# EAGLE board logic 7408.v1.2 (EAGLE 7.1.0)
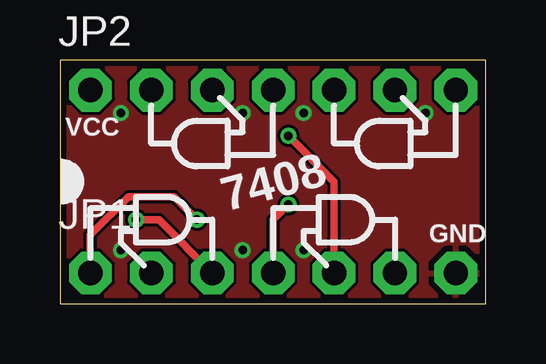
[diagram p0: board, top side]
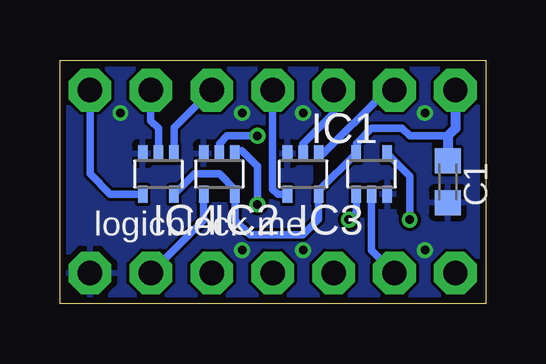
[diagram p1: board, bottom side, seen from below]

Size 17.76 x 10.15 mm. Coordinates in mm from the lower left corner, seen from the top.
Outline: 0,0 17.76,0 17.76,10.15 0,10.15 0,0
Copper layers (1*16): Top 0.035mm / dielectric 1.5mm / Bottom 0.035mm
Design rules "dirt_cheap_dirty_boards.v1": minimum track width 5mil, minimum drill 12mil, track to track 5mil, track to pad 5mil, pad to pad 5mil, via to via 5mil, smd to smd 0mil, copper to edge 10mil, drill to drill 10mil, minimum pad ring 10mil, minimum via ring 6mil, stop-mask expansion 2mil, vias tented up to drill 25mil, thermal gap 10mil
bRestrict: 3 lines

## Footprints (pad centres in the part's own frame; a part is rotated, then mirrored left to right if it is on the bottom)
C0603K = smd 1.05 x 1.08: 1 -0.875,0; 2 0.875,0
SC70-5 = smd 0.4 x 0.7: 1 -0.65,-0.85; 2 0,-0.85; 3 0.65,-0.85; 4 0.65,0.85; 5 -0.65,0.85
CON_1X07-CLEANBIG = drill 1.016 pad 1.778 octagon: 1 -8.89,0; 2 -6.35,0; 3 -3.81,0; 4 -1.27,0; 5 1.27,0; 6 3.81,0; 7 6.35,0

## Placement (x,y rotation side)
C1  100nF  [C0603K]  1.59,5.08 270 bottom
IC1  [SC70-5]  4.76,5.4 0 bottom
IC2  [SC70-5]  11.11,5.4 180 bottom
IC3  [SC70-5]  7.62,5.4 180 bottom
IC4  [SC70-5]  13.65,5.4 180 bottom
JP1  [CON_1X07-CLEANBIG]  10.16,1.27 0 top
JP2  [CON_1X07-CLEANBIG]  10.16,8.89 0 top
U$1  OSHW-LOGOS-LAYER230  [OSHW-LOGO-S_LAYER230]  16.19,5.4 90 top

## Library data of the parts
C1 = rcl
IC1-IC4 = 74xx-little-de
JP1 JP2 = Ardublog
U$1 = logicblock

## Nets
1Y: IC1.4 JP1.3
2Y: IC2.4 JP1.6
3Y: IC4.4 JP2.7
4Y: IC3.4 JP2.4
GND: C1.2 IC1.3 IC2.3 IC3.3 IC4.3 JP1.7
N$1: IC1.1 JP1.1
N$2: IC1.2 JP1.2
N$4: IC4.2 JP2.6
N$5: IC2.1 JP1.4
N$6: IC2.2 JP1.5
N$7: IC4.1 JP2.5
N$9: IC3.2 JP2.3
N$10: IC3.1 JP2.2
VCC: C1.1 IC1.5 IC2.5 IC3.5 IC4.5 JP2.1

## Tracks (layer width: path | path; a pad name or v marks a point on that pad's centre or on a via)
1Y  (via drill 0.36)
  Top 0.305: v3.17,3.49 4.13,3.49 JP1.3
  Bottom 0.305: IC1.4 3.17,5.31 v3.17,3.49
2Y
  Bottom 0.305: IC2.4 11.76,3.48 JP1.6
3Y
  Bottom 0.305: IC4.4 15.66,4.55 16.51,5.4 JP2.7
4Y
  Bottom 0.305: IC3.4 8.68,4.55 8.89,4.76 JP2.4
GND  (via drill 0.36)
  other vias: 2.54,2.22 2.54,7.94 7.62,7.94 15.24,7.94 7.62,2.22 10.16,2.22 10.16,7.94
  pour Bottom: 0,0 0,10.16 17.78,10.16 17.78,0
  pour Top: 0,0 0,10.16 17.78,10.16 17.78,0
N$1  (via drill 0.36)
  Top 0.305: v5.71,3.49 4.76,4.45 2.86,4.45 1.27,2.86 JP1.1
  Bottom 0.305: IC1.1 5.41,4.43 5.4,4.43 5.4,3.81 v5.71,3.49
N$2
  Bottom 0.305: IC1.2 4.76,2.22 JP1.2
N$4
  Bottom 0.305: JP2.6 13.97,7.62 13.65,7.3 IC4.2
N$5  (via drill 0.36)
  Top 0.305: v9.53,4.13 8.89,3.49 JP1.4
  Bottom 0.305: IC2.1 10.46,6.37 10.18,6.37 9.53,5.71 v9.53,4.13
N$6  (via drill 0.36)
  Top 0.305: v9.53,6.99 11.43,5.08 JP1.5
  Bottom 0.305: IC2.2 11.11,6.67 10.79,6.99 v9.53,6.99
N$7
  Bottom 0.305: IC4.1 13,7.32 JP2.5
N$9
  Bottom 0.305: IC3.2 7.62,6.67 6.35,7.94 JP2.3
N$10
  Bottom 0.305: IC3.1 6.97,6.05 4.13,8.89 JP2.2
VCC
  Bottom 0.305: 1.59,6.99 3.17,6.99 3.49,7.3 4.76,7.3 5.4,6.67 5.4,6.33 5.41,6.33 IC1.5 6.97,4.69 IC3.5 6.97,3.51 7.62,2.86 9.84,2.86 10.46,3.48 IC2.5 10.46,4.75 11.11,5.4 12.15,5.4 IC4.5
  Bottom 0.406: JP2.1 1.27,7.3 1.59,6.99 C1.1

## Text on the board
tsilkscreen: VCC | 7408 | GND
bsilkscreen: logicblock.me